# Altium PCB lichten.PcbDoc
Units mil, origin at the board's own origin, x right, y up, seen from the top; angles counter-clockwise.
Board outline 6000 x 4000 mil, 2 copper layers (Top Layer, Bottom Layer); 17 components, 14 nets, 64 pads, 7 vias.
Unrouted connection lines stored in the file: 3.
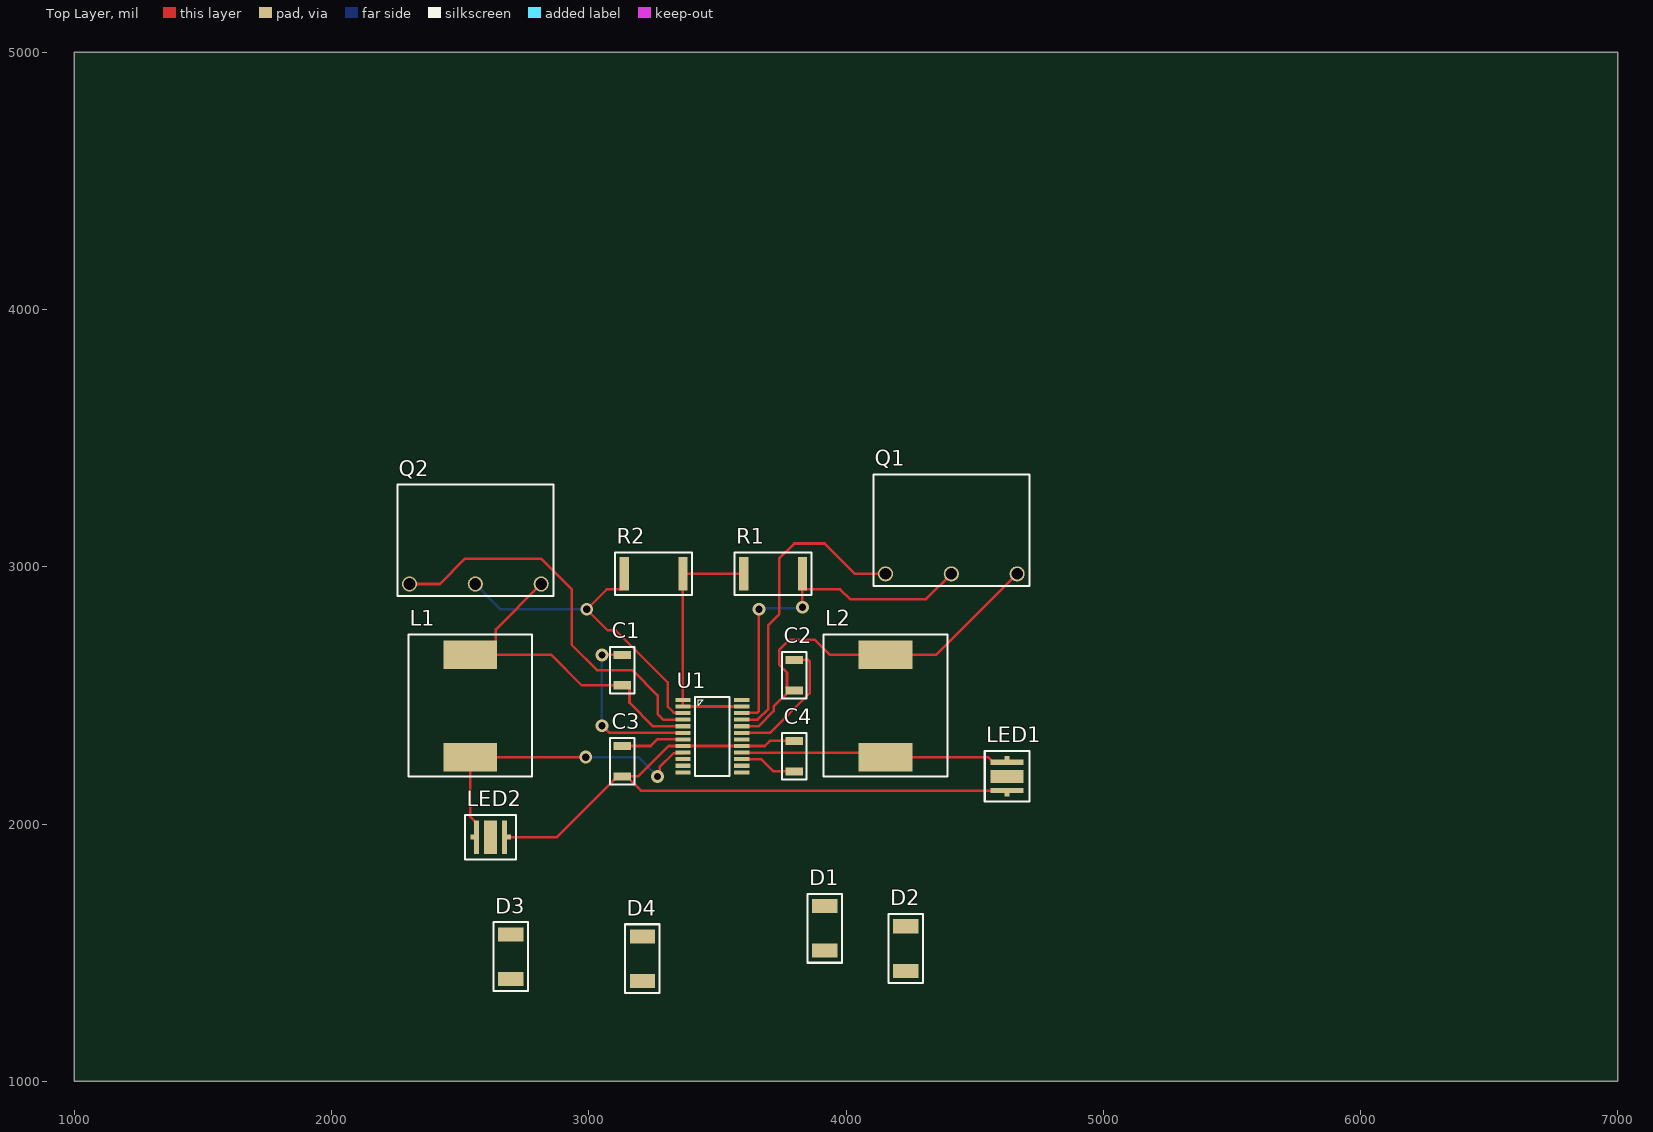
[diagram p0: Top Layer view]
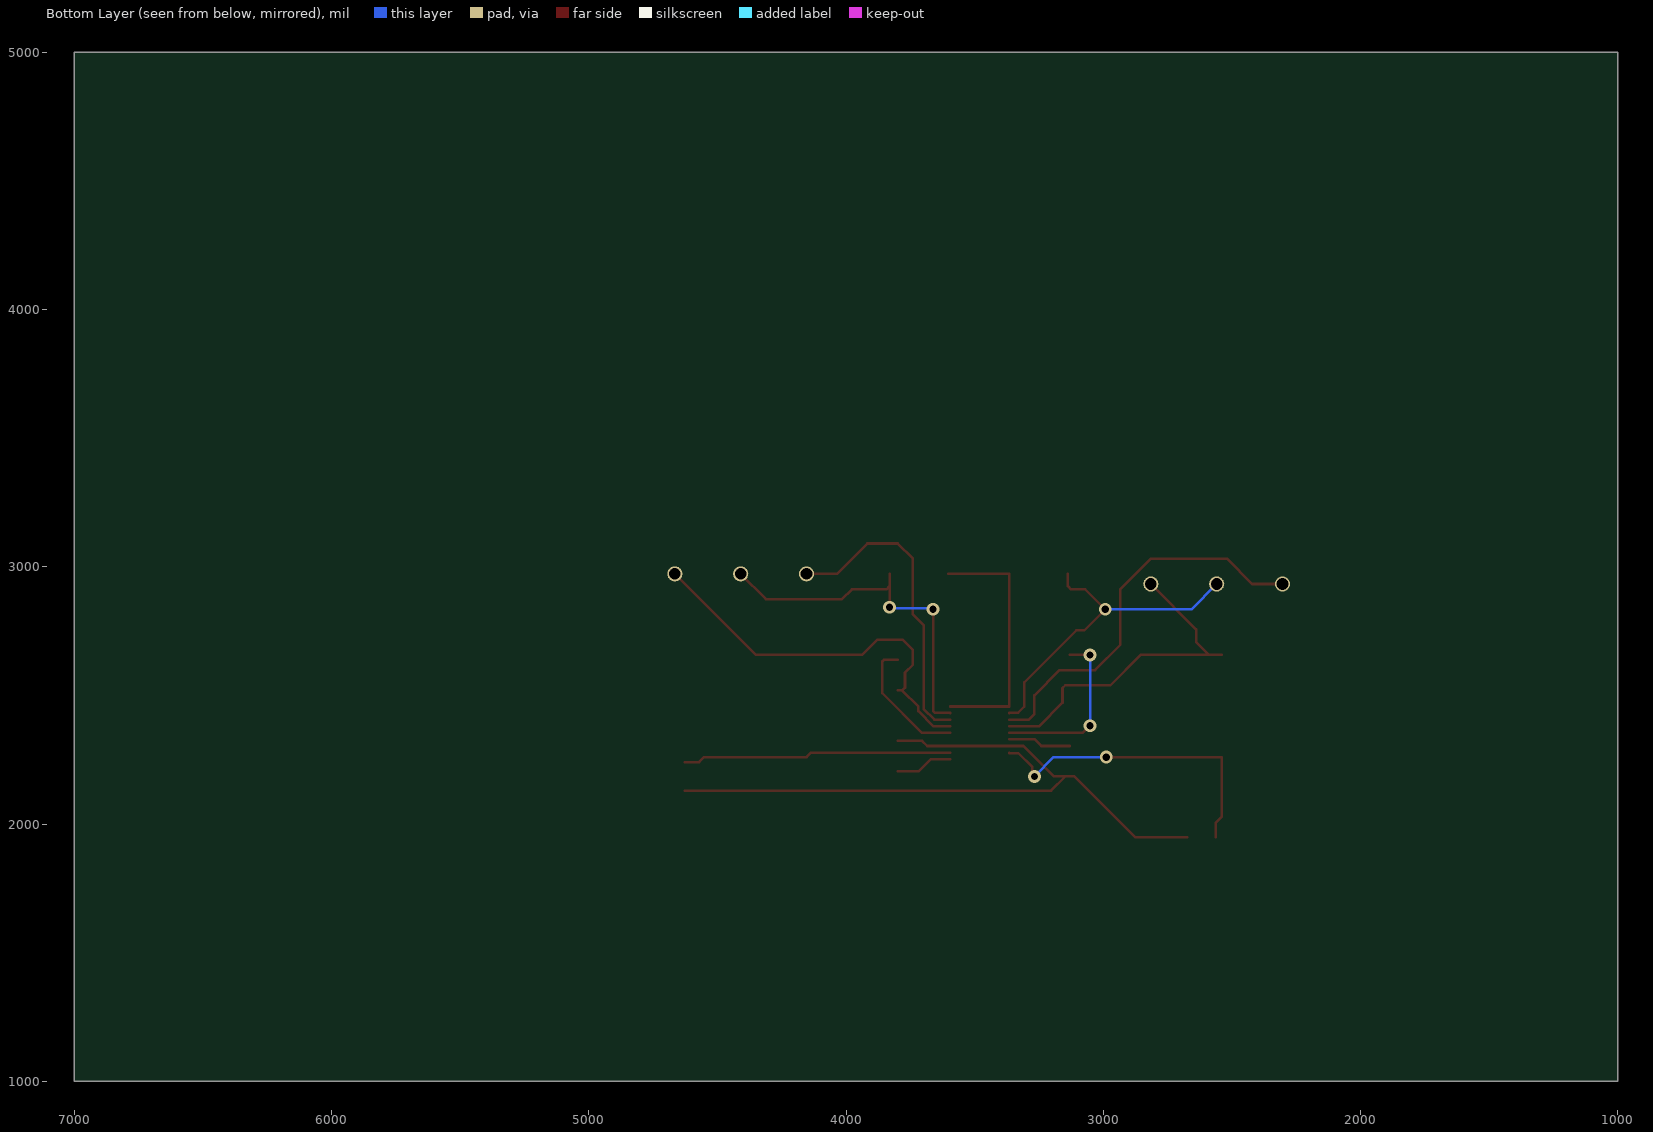
[diagram p1: Bottom Layer view, seen from below]

## Layer stack, top to bottom
Top Solder: solder mask 0.4, Solder Resist, Dk 3.5
Top Layer: signal copper 1.4
Dielectric 1: dielectric 12.6, FR-4, Dk 4.8
Bottom Layer: signal copper 1.4
Bottom Solder: solder mask 0.4, Solder Resist, Dk 3.5

## Board outline
1000,1000 7000,1000 7000,5000 1000,5000

## Design rules (kind name [scope] priority, off if disabled: settings)
Clearance [All] p1: gap=10 ignorepadtopadclearanceinfootprint=FALSE except(0: Arc-Hole Track-Hole SMDPad-Hole THPad-Hole Via-Hole Fill-Hole Poly-Hole Region-Hole Text-Hole)
MinimumSolderMaskSliver [All] p1: minsoldermaskwidth=3.94
PolygonConnect [All] p1: connectstyle=Relief reliefconductorwidth=10 reliefentries=4 polygonreliefangle="90 Angle" airgapwidth=10
RoomDefinition lichten [InComponentClass('lichten')] p1: confinementstyle=ConfineIn formatcopy=TRUE lockcomponents=FALSE outline 0,0 2000,0 2000,1000 0,1000
RoutingVias [All] p1: holewidth=28 width=50 viastyle="Through Hole" minholewidth=28 minwidth=50 maxholewidth=28 maxwidth=50
SolderMaskExpansion [All] p1: expansion=4 istentingtop=FALSE
Width [All] p1: maxlimit=10 minlimit=10 preferedwidth=10
29 further rules are at their usual default settings.

## Components (designator, comment, footprint, x,y, rotation, side; value= is the part's Value field where it differs from the comment)
C1 "0.1µF" RC1206 3129.92,2598.43 r90 top
C2 "0.1µF" RC1206 3799.21,2578.74 r90 top
C3 "0.1µF" RC1206 3129.92,2244.09 r90 top
C4 "0.1µF" RC1206 3799.21,2263.78 r270 top
D1 "schottky" PMEG3050EP,115 3917.32,1594.49 r90 top
D2 "schottky" PMEG3050EP,115 4232.28,1515.75 r90 top
D3 "schottky" PMEG3050EP,115 2696.85,1484.25 r90 top
D4 "schottky" PMEG3050EP,115 3208.66,1476.38 r90 top
L1 "68µH" SRR1210-680M 2539.37,2259.84 r0 top
L2 "68µH" SRR1210-680M 4153.54,2259.84 r0 top
LED1 "XPEBWT-L1-0000-00EE5" XPEBWT-L1-0000-00EE5 4625.98,2185.04 r270 top
LED2 "XPEBWT-L1-0000-00EE5" XPEBWT-L1-0000-00EE5 2618.11,1948.82 r0 top
Q1 "MOSFET N-CH" "IRLR024NTRPBF - DUPLICATE" 4153.54,2972.44 r0 top
Q2 "MOSFET N-CH" "IRLR024NTRPBF - DUPLICATE" 2303.15,2933.07 r0 top
R1 "Current shunt" ERJ-1TRQFR22U 3716.54,2972.44 r180 top
R2 "Current shunt" ERJ-1TRQFR22U 3251.97,2972.44 r180 top
U1 "LED Driver" TPS92518PWPT 3480.31,2482.28 r0 top

## Footprints (in the part's own frame and the unit in brackets; to place one, negate y for a bottom-side part, rotate by r counter-clockwise, add the part's x,y. Pads: shape width x height; smd on the part's side, far side on the other; paste and mask are expansions set on the pad)
ERJ-1TRQFR22U [mm]
  rect 0.9x3.3 smd: 1(-2.9,0) 2(2.9,0)
  silkscreen extent -3.8,-2.1 3.8,2.1
"IRLR024NTRPBF - DUPLICATE" [mm]
  round 1.5 hole 1.14: 1(0,0) 2(6.5,0) 3(13,0)
  silkscreen extent -1.2,-1.2 14.2,9.8
PMEG3050EP,115 [mm]
  rect 1.4x2.5 smd: A(-2.2,0) K(2.2,0)
  silkscreen extent -3.4,-1.7 3.4,1.7
RC1206 [mm]
  rect 0.8x1.7 smd: 1(-1.5,0) 2(1.5,0)
  silkscreen extent -2.3,-1.2 2.3,1.2
SRR1210-680M [mm]
  rect 5.3x2.8 smd: 1(0,0) 2(0,10.1)
  silkscreen extent -6.1,-1.9 6.1,12.1
TPS92518PWPT [mm]
  rect 1.5x0.4 smd: 1(-2.9,0) 2(-2.9,-0.65) 3(-2.9,-1.3) 4(-2.9,-1.95) 5(-2.9,-2.6) 6(-2.9,-3.25) 7(-2.9,-3.9) 8(-2.9,-4.55) 9(-2.9,-5.2) 10(-2.9,-5.85) 11(-2.9,-6.5) 12(-2.9,-7.15) 13(2.9,-7.15) 14(2.9,-6.5) 15(2.9,-5.85) 16(2.9,-5.2) 17(2.9,-4.55) 18(2.9,-3.9) 19(2.9,-3.25) 20(2.9,-2.6) 21(2.9,-1.95) 22(2.9,-1.3) 23(2.9,-0.65) 24(2.9,0)
  silkscreen extent -1.7,-7.5 1.7,0.3
XPEBWT-L1-0000-00EE5 [mm]
  rect 0.4x0.5 smd: 1(-1.8,0) 2(1.8,0)
  rect 0.5x3.3 smd: 1(-1.4,0) 2(1.4,0)
  rect 1.3x3.3 smd: ""(0,0)
  silkscreen extent -2.5,-2.2 2.5,2.2

## Part data
C1 C2 C3 C4: library part C0805C104K5RACTU, "Cap Ceramic 0.1uF 50V X7R 10% SMD 2.0 x 1.2 mm 125 C Paper T/R", Capacitance=100nF, Case Code (Imperial)=0805, Case Code (Metric)=2012, Dielectric=X7R, Dielectric Material=Ceramic, Manufacturer=KEMET, Max Operating Temperature=125°C, Min Operating Temperature=-55°C, Package Quantity=4000, Supplier Part Number 1=1414664, Tolerance=10%, Voltage=500V, Voltage Rating=50V, Case/Package=0805, Category="Ceramic Capacitors", ComponentLink1Description=https://datasheet.ciiva.com/14589/70095383-14589048.pdf?src-supplier=Allied+Electronics, ComponentLink1URL=https://datasheet.ciiva.com/14589/70095383-14589048.pdf?src-supplier=Allied+Electronics, ComponentLink2Description=https://datasheet.ciiva.com/28682/1851736-28682232.pdf?src-supplier=Element14, ComponentLink2URL=https://datasheet.ciiva.com/28682/1851736-28682232.pdf?src-supplier=Element14, ComponentLink3Description=https://datasheet.ciiva.com/32431/slceramic-chip-condensers-e-32431755.pdf?src-supplier=Distrelec, ComponentLink3URL=https://datasheet.ciiva.com/32431/slceramic-chip-condensers-e-32431755.pdf?src-supplier=Distrelec, ComponentLink4Description=https://datasheet.ciiva.com/18410/70095383-18410815.pdf?src-supplier=Allied+Electronics, ComponentLink4URL=https://datasheet.ciiva.com/18410/70095383-18410815.pdf?src-supplier=Allied+Electronics, Construction=Flat, Contact Plating=Tin,Matte, Depth=1.25mm, Height=0.9mm, Lead Pitch=0.75mm, Length=2mm, Manufacturer Part Number=C0805C104K5RACTU, Mount="Surface Mount,PCB", Number of Pins=2, Packaging="Tape and Reel", Pricing 1="10=0,07810, 100=0,05810, 500=0,03910, 1000=0,03450, 2000=0,03090 (GBP)", Radiation Hardening=No, REACH SVHC="No SVHC", RoHS=Yes, RoHS Compliant=Yes, Series=C0805C, Stock 1=148517, Supplier 1=Farnell, Termination=SMD/SMT, Thickness=0.035inch, Voltage Rating (DC)=50V, Width=1.2mm
D1 D2 D3 D4: library part PMEG3050EP,115, "NEXPERIA - PMEG3050EP,115 - Schottky-likriktare, 30 V, 5 A, Enkel, SOD-128, 2 Stift, 360 mV", Manufacturer="Nexperia USA", Supplier Part Number 1=1829197, ComponentLink1Description=http://www.farnell.com/datasheets/609324.pdf?src-supplier=Farnell, ComponentLink1URL=http://www.farnell.com/datasheets/609324.pdf?src-supplier=Farnell, ComponentLink2Description=https://assets.nexperia.com/documents/data-sheet/PMEG3050EP.pdf?src-supplier=Digi-Key, ComponentLink2URL=https://assets.nexperia.com/documents/data-sheet/PMEG3050EP.pdf?src-supplier=Digi-Key, Manufacturer Part Number=PMEG3050EP,115, Pricing 1="5=0,38500, 10=0,33600, 100=0,21500, 500=0,14100, 1000=0,10700, 5000=0,10300 (GBP)", RoHS=No, Stock 1=110544, Supplier 1=Farnell
L1 L2: library part SRR1210-680M, "BOURNS         SRR1210-680M.             INDUCTOR, SHIELDED, 68UH, 2.7A, SMD", Case/Package=1210, Current Rating=3A, DC Resistance (DCR)=102mR, Inductance=68uH, Inductance Tolerance=20%, Manufacturer=Bourns, Max Operating Temperature=125°C, Min Operating Temperature=-40°C, Package Quantity=250, Resistor Type=Wirewound, Saturation Current=2.7A, Self Resonant Frequency=3.8MHz, Supplier Part Number 1=2434810, Test Frequency=100kHz, Category="Fixed Inductors", ComponentLink1Description=https://datasheet.ciiva.com/11799/0900766b80f2b72a-11799858.pdf?src-supplier=RSComponents, ComponentLink1URL=https://datasheet.ciiva.com/11799/0900766b80f2b72a-11799858.pdf?src-supplier=RSComponents, ComponentLink2Description=https://datasheet.ciiva.com/48684/srr1210-48684857.pdf?src-supplier=Avnet, ComponentLink2URL=https://datasheet.ciiva.com/48684/srr1210-48684857.pdf?src-supplier=Avnet, ComponentLink3Description=https://datasheet.ciiva.com/17285/srr1210-17285962.pdf?src-supplier=Avnet+Europe, ComponentLink3URL=https://datasheet.ciiva.com/17285/srr1210-17285962.pdf?src-supplier=Avnet+Europe, ComponentLink4Description=https://datasheet.ciiva.com/6697/srr1210-6697611.pdf?src-supplier=Digi-Key, ComponentLink4URL=https://datasheet.ciiva.com/6697/srr1210-6697611.pdf?src-supplier=Digi-Key, ComponentLink5Description=https://datasheet.ciiva.com/46437/1430851-46437356.pdf?src-supplier=Element14, ComponentLink5URL=https://datasheet.ciiva.com/46437/1430851-46437356.pdf?src-supplier=Element14, ComponentLink6Description=https://datasheet.ciiva.com/6697/srr1210-6697613.pdf?src-supplier=Digi-Key, ComponentLink6URL=https://datasheet.ciiva.com/6697/srr1210-6697613.pdf?src-supplier=Digi-Key, ComponentLink7Description=https://datasheet.ciiva.com/46437/1430851-46437357.pdf?src-supplier=Element14, ComponentLink7URL=https://datasheet.ciiva.com/46437/1430851-46437357.pdf?src-supplier=Element14, ComponentLink8Description=https://datasheet.ciiva.com/6697/srr1210-6697615.pdf?src-supplier=Digi-Key, ComponentLink8URL=https://datasheet.ciiva.com/6697/srr1210-6697615.pdf?src-supplier=Digi-Key, Core Material=Ferrite, DC Current=3A, Depth=12.5mm, Height=10mm, Height - Seated (Max)=0.394inch, Length=12mm, Manufacturer Part Number=SRR1210-680M, Max DC Current=3A, Military Standard=Not, Mount="Surface Mount", Packaging="Tape and Reel", Pricing 1="1=0,82800, 10=0,75600, 25=0,68400, 50=0,57100, 100=0,53600, 250=0,46600, 1250=0,43300 (GBP)", Q Factor=12, REACH SVHC="No SVHC", RMS Current (Irms)=3A, RoHS=Yes, RoHS Compliant=Yes, Series=SRR1210, Shielding=Shielded, Stock 1=3, Supplier 1=Farnell, Termination=SMD/SMT, Tolerance=20%, Width=0.472inch
LED1 LED2: "LED, XLAMP, XP-E, NEUTRAL WHITE, 114LM", Case/Package=SMD/SMT, Color=White, Color Rendering Index (CRI)=75, Correlated Color Temperature (CCT)=4000K, Forward Current=350mA, Forward Voltage=2.9V, Lens Color=Clear, Manufacturer=Cree, Max Current Rating=1A, Max Operating Temperature=85°C, Max Power Dissipation=3W, Package Quantity=1000, Supplier Part Number 1=2216685, Thermal Resistance of Package=9°C/W, Category=LEDs, ComponentLink1Description=https://datasheet.ciiva.com/6348/xlampxpbl-6348581.pdf?src-supplier=Digi-Key, ComponentLink1URL=https://datasheet.ciiva.com/6348/xlampxpbl-6348581.pdf?src-supplier=Digi-Key, ComponentLink2Description=https://datasheet.ciiva.com/8073/xlampxpe-8073289.pdf?src-supplier=Element14, ComponentLink2URL=https://datasheet.ciiva.com/8073/xlampxpe-8073289.pdf?src-supplier=Element14, ComponentLink3Description=https://datasheet.ciiva.com/6348/xlampxpbl-6348587.pdf?src-supplier=Digi-Key, ComponentLink3URL=https://datasheet.ciiva.com/6348/xlampxpbl-6348587.pdf?src-supplier=Digi-Key, ComponentLink4Description=https://datasheet.ciiva.com/22791/xlampxpe-22791615.pdf?src-supplier=Farnell, ComponentLink4URL=https://datasheet.ciiva.com/22791/xlampxpe-22791615.pdf?src-supplier=Farnell, Depth=3.45mm, Height=2.36mm, Illumination Color=White, Lead Free="Lead Free", Length=3.45mm, Lens Style=Square, Luminous Flux=114lm, Manufacturer Part Number=XPEBWT-L1-0000-00EE5, Mount="Surface Mount", Number of Elements=1, Number of LEDs=1, Number of Pins=2, Packaging="Tape and Reel", Pricing 1="1=0,98400, 10=0,93000, 25=0,90700, 50=0,87600, 100=0,84500, 250=0,76600, 500=0,75600 (GBP)", Radiation Hardening=No, REACH SVHC=Unknown, RoHS=Yes, RoHS Compliant=Yes, Series="Xlamp XP-E2", Stock 1=979, Supplier 1=Farnell, Test Current=350mA, Viewing Angle=110°, Width=3.45mm
Q1 Q2: library part IRLR024NTRPBF, "Trans MOSFET N-CH 55V 17A 3-Pin(2+Tab) DPAK T/R", Case/Package=DPAK, Continuous Drain Current (ID)=17A, Drain to Source Breakdown Voltage=55V, Drain to Source Resistance=110mR, Drain-source On Resistance-Max=80mR, Gate to Source Voltage (Vgs)=16V, Input Capacitance=480pF, Manufacturer="International Rectifier", Max Operating Temperature=175°C, Max Power Dissipation=45W, Min Operating Temperature=-55°C, Package Quantity=1, Supplier Part Number 1=2468052, Category=MOSFETs, ComponentLink1Description=https://datasheet.ciiva.com/34303/2029683-34303947.pdf?src-supplier=Jameco, ComponentLink1URL=https://datasheet.ciiva.com/34303/2029683-34303947.pdf?src-supplier=Jameco, ComponentLink2Description=https://datasheet.ciiva.com/7835/irlr024npbf-7835786.pdf?src-supplier=Element14, ComponentLink2URL=https://datasheet.ciiva.com/7835/irlr024npbf-7835786.pdf?src-supplier=Element14, ComponentLink3Description=https://datasheet.ciiva.com/937/irlr024npbf-937362.pdf?src-supplier=Digi-Key, ComponentLink3URL=https://datasheet.ciiva.com/937/irlr024npbf-937362.pdf?src-supplier=Digi-Key, ComponentLink4Description=https://datasheet.ciiva.com/937/irlr024npbf-937363.pdf?src-supplier=Digi-Key, ComponentLink4URL=https://datasheet.ciiva.com/937/irlr024npbf-937363.pdf?src-supplier=Digi-Key, ComponentLink5Description=https://datasheet.ciiva.com/937/irlr024npbf-937361.pdf?src-supplier=Digi-Key, ComponentLink5URL=https://datasheet.ciiva.com/937/irlr024npbf-937361.pdf?src-supplier=Digi-Key, ComponentLink6Description=https://datasheet.ciiva.com/16364/irlr024npbf-16364248.pdf?src-supplier=Future+Electronics, ComponentLink6URL=https://datasheet.ciiva.com/16364/irlr024npbf-16364248.pdf?src-supplier=Future+Electronics, Current Rating=17A, Drain to Source Voltage (Vdss)=55V, Element Configuration=Single, Fall Time=29ns, Height=2.39mm, Lead Free="Lead Free", Length=6.73mm, Manufacturer Part Number=IRLR024NTRPBF, Mount="Surface Mount", Nominal Vgs=2V, Number of Elements=1, Number of Pins=3, On-State Resistance=80mR, Packaging="Tape and Reel", Power Dissipation=45W, Pricing 1="1=0,84600, 10=0,61400, 100=0,43100, 500=0,37300, 1000=0,28400 (GBP)", Radiation Hardening=No, Rds On Max=65mR, REACH SVHC="No SVHC", Rise Time=74ns, RoHS=Yes, RoHS Compliant=Yes, Series=HEXFET®, Stock 1=4226, Supplier 1=Farnell, Turn-Off Delay Time=20ns, Turn-On Delay Time=7.1ns, Voltage Rating (DC)=55V, Width=6.22mm
R1 R2: library part ERJ-1TRQFR22U, "Res Thick Film 2512 0.22 Ohm 1% 1W 200ppm/C Molded SMD SMD Embossed Carrier T/R", Case Code (Imperial)=2512, Case Code (Metric)=6432, Manufacturer=Panasonic, Max Operating Temperature=125°C, Max Power Dissipation=1W, Min Operating Temperature=-55°C, Package Quantity=1, Resistance=220mR, Resistance Tolerance=1%, Resistor Type="Thick Film,Low-Ohm-Resistor", Supplier Part Number 1=1717950, Temperature Coefficient=200ppm/°C, Case/Package=2512, Category="Chip SMD Resistors", ComponentLink1Description=https://datasheet.ciiva.com/11810/0900766b80eefa12-11810196.pdf?src-supplier=RSComponents, ComponentLink1URL=https://datasheet.ciiva.com/11810/0900766b80eefa12-11810196.pdf?src-supplier=RSComponents, ComponentLink2Description=https://datasheet.ciiva.com/48537/erj-eng-tds-48537781.pdf?src-supplier=Distrelec, ComponentLink2URL=https://datasheet.ciiva.com/48537/erj-eng-tds-48537781.pdf?src-supplier=Distrelec, ComponentLink3Description=https://datasheet.ciiva.com/30080/6aoa0000ce3-30080535.pdf?src-supplier=Onlinecomponents.com, ComponentLink3URL=https://datasheet.ciiva.com/30080/6aoa0000ce3-30080535.pdf?src-supplier=Onlinecomponents.com, ComponentLink4Description=https://datasheet.ciiva.com/17206/aoa0000ce3-17206874.pdf?src-supplier=Avnet+Europe, ComponentLink4URL=https://datasheet.ciiva.com/17206/aoa0000ce3-17206874.pdf?src-supplier=Avnet+Europe, ComponentLink5Description=https://datasheet.ciiva.com/43455/391509-43455978.pdf?src-supplier=Farnell, ComponentLink5URL=https://datasheet.ciiva.com/43455/391509-43455978.pdf?src-supplier=Farnell, ComponentLink6Description=https://datasheet.ciiva.com/24165/aoa0000ce3-72189-24165531.pdf?src-supplier=Mouser, ComponentLink6URL=https://datasheet.ciiva.com/24165/aoa0000ce3-72189-24165531.pdf?src-supplier=Mouser, ComponentLink7Description=https://datasheet.ciiva.com/16760/70068852-16760588.pdf?src-supplier=Allied+Electronics, ComponentLink7URL=https://datasheet.ciiva.com/16760/70068852-16760588.pdf?src-supplier=Allied+Electronics, ComponentLink8Description=https://datasheet.ciiva.com/6064/391509-6064542.pdf?src-supplier=Farnell, ComponentLink8URL=https://datasheet.ciiva.com/6064/391509-6064542.pdf?src-supplier=Farnell, ComponentLink9Description=https://datasheet.ciiva.com/9118/aoa0000ce3-9118718.pdf?src-supplier=Avnet, ComponentLink9URL=https://datasheet.ciiva.com/9118/aoa0000ce3-9118718.pdf?src-supplier=Avnet, ComponentLink10Description=https://datasheet.ciiva.com/16759/70068852-16759694.pdf?src-supplier=Allied+Electronics, ComponentLink10URL=https://datasheet.ciiva.com/16759/70068852-16759694.pdf?src-supplier=Allied+Electronics, ComponentLink11Description=https://datasheet.ciiva.com/16516/aoa0000ce3-16516271.pdf?src-supplier=Avnet+Asia, ComponentLink11URL=https://datasheet.ciiva.com/16516/aoa0000ce3-16516271.pdf?src-supplier=Avnet+Asia, Construction=Rectangular, Contact Plating=Tin, Depth=3.2mm, Features="Automotive AEC-Q200", Height=0.6mm, Length=6.4mm, Manufacturer Part Number=ERJ-1TRQFR22U, Military Standard=Not, Mount="Surface Mount", Number of Pins=2, Number of Terminations=2, Packaging="Tape and Reel", Power Rating=1W, Pricing 1="10=0,33700, 100=0,23200, 500=0,18800, 1000=0,15200, 2000=0,14200, 4000=0,13200, 20000=0,13100 (GBP)", Radiation Hardening=No, REACH SVHC="No SVHC", RoHS=Yes, RoHS Compliant=Yes, Series=ERJ, Size Code=2512, Stock 1=2340, Supplier 1=Farnell, Technology="THICK FILM", Termination=SMD/SMT, Tolerance=1%, Weight=0.001429oz, Width=3.2mm
U1: library part TPS92518PWPT, "42-V Dual buck LED controller with SPI interface, analog and PWM dimming 24-HTSSOP -40 to 125", Manufacturer="Texas Instruments", Max Operating Temperature=125°C, Min Operating Temperature=-40°C, Supplier Part Number 1=2837370, Category="LED Drivers", ComponentLink1Description=datasheet, ComponentLink1URL=https://www.ti.com/lit/ds/symlink/tps92518.pdf?ts=1620677843233&ref_url=https%253A%252F%252Fwww.ti.com%252Fsitesearch%252Fdocs%252Funiversalsearch.tsp%253FsearchTerm%253DTPS92518PWPT%2526nr%253D6, Manufacturer Part Number=TPS92518PWPT, Pricing 1="1=2,12000, 10=1,81000, 25=1,69000, 50=1,56000, 100=1,44000 (GBP)", RoHS=Yes, RoHS Compliant=Yes, Stock 1=60, Supplier 1=Farnell

## Via types
v1: diameter 50, hole 28, Top Layer to Bottom Layer, 7 vias

## Nets (pads, with @x,y where several pads share a name; then routed paths per layer and width w, separated by ;. In a path a pad name is that pad's centre, name@x,y a point inside that pad or via, vN(x,y) a via of type N, cw(c..) or ccw(c..) an arc to the next point about the centre after c; other vN are vias at no path point)
GND: C3.1 C4.1 LED1.2 LED2.2 U1.8 U1.17 | length 2782.1
  Top Layer w10: LED2.2@2673.23,1948.82 2688.98,1948.82 2875.98,1948.82 3112.2,2185.04 C3.1 C3.1@3147.64,2185.04 ; C4.1 3703.86,2322.83 3684.17,2303.15 U1.17 U1.8 3309.92,2303.15 3191.81,2185.04 C3.1@3147.64,2185.04 ; LED1.2@4625.98,2129.92 3202.76,2129.92 C3.1@3147.64,2185.04
NetC1_1: C1.1 L1.2 Q2.3 U1.5 | length 1344.5
  Top Layer w10: L1.2 L1.2@2588.58,2657.48 ; Q2.3 2638.7,2756.81 2638.7,2707.6 L1.2@2588.58,2657.48 ; U1.5 3250,2379.92 3158.39,2471.54 3158.39,2528.62 3147.64,2539.37 C1.1 2972.44,2539.37 2854.33,2657.48 L1.2@2588.58,2657.48
NetC1_2: C1.2 U1.6 | length 680.7
  Top Layer w10: v1(3051.18,2381.89) 3052.63,2381.89 3080.19,2354.33 U1.6 ; v1(3051.18,2657.48) C1.2
  Bottom Layer w10: v1(3051.18,2381.89) v1(3051.18,2657.48)
NetC2_1: C2.1 L2.2 Q1.3 U1.20 | length 1543.9
  Top Layer w10: U1.20 3659.21,2379.92 3718.34,2439.05 3718.34,2456.53 C2.1@3781.5,2519.69 ; C2.1 C2.1@3781.5,2519.69 ; Q1.3 4350.39,2657.48 L2.2 3937.01,2657.48 3877.95,2716.54 3779.53,2716.54 3740.16,2677.17 3740.16,2619.09 3770.75,2588.5 3770.75,2530.43 C2.1@3781.5,2519.69
NetC2_2: C2.2 U1.19 | length 512.7
  Top Layer w10: U1.19 3704.28,2354.33 3858.27,2508.31 3858.27,2631.94 3852.41,2637.8 C2.2
NetC3_2: C3.2 U1.7 U1.10 | length 246.8
  Top Layer w10: C3.2 3240.16,2303.15 3265.75,2328.74 U1.7
NetC4_2: C4.2 U1.15 U1.18 U1.24 | length 224.3
  Top Layer w10: U1.15 3670.39,2251.97 3717.64,2204.72 C4.2
NetL1_1: L1.1 LED2.1 U1.9 | length 1236.6
  Top Layer w10: LED2.1@2562.99,1948.82 2562.99,2003.94 2539.37,2027.56 L1.1 v1(2988.19,2259.84) ; v1(3267.72,2185.04) 3275.37,2192.69 3275.37,2220.8 3330.4,2275.83 3364.41,2275.83 U1.9
  Bottom Layer w10: v1(2988.19,2259.84) 2992.13,2263.78 2996.06,2259.84 3192.91,2259.84 v1(3267.72,2185.04)
NetL2_1: L2.1 LED1.1 U1.16 | length 1047
  Top Layer w10: U1.16 4135.83,2277.56 L2.1 4551.18,2259.84 4570.87,2240.16 LED1.1@4625.98,2240.16
NetQ1_1: Q1.1 U1.21 | length 1209.4
  Top Layer w10: U1.21 3656.52,2405.51 3698.34,2447.33 3698.34,2773.14 3740.16,2814.96 3740.16,3031.5 3799.21,3090.55 3917.32,3090.55 4035.43,2972.44 Q1.1
NetQ1_2: Q1.2 R1.1 U1.22 | length 1409.2
  Top Layer w10: U1.22 3596.22,2432.83 3655.56,2432.83 3661.42,2438.69 v1(3661.42,2834.65) ; v1(3830.71,2842.52) R1.1@3830.71,2925.2 ; R1.1 R1.1@3830.71,2925.2 ; Q1.2 4311.02,2874.02 4015.75,2874.02 3977.28,2912.48 3843.43,2912.48 R1.1@3830.71,2925.2
  Bottom Layer w10: v1(3661.42,2834.65) 3665.35,2838.58 3826.77,2838.58 v1(3830.71,2842.52)
NetQ2_1: Q2.1 U1.4 | length 1532.6
  Top Layer w10: Q2.1 2421.26,2933.07 2519.68,3031.5 2814.96,3031.5 2933.07,2913.39 2933.07,2696.85 3031.5,2598.43 3169.29,2598.43 3267.72,2500 3267.72,2427.12 3289.32,2405.51 U1.4
NetQ2_2: Q2.2 R2.2 U1.3 | length 1300.8
  Top Layer w10: R2.2 3137.8,2925.2 3125.08,2912.48 3069.96,2912.48 v1(2992.13,2834.65) 3073.55,2753.22 3104.61,2753.22 3307.09,2550.74 3307.09,2456.15 3330.4,2432.83 3364.41,2432.83 U1.3
  Bottom Layer w10: Q2.2 2657.48,2834.65 v1(2992.13,2834.65)
NetR1_2: R1.2 R2.1 U1.1 U1.2 U1.23 | length 980.3
  Top Layer w10: U1.23 U1.2 U1.1 R2.1 R1.2
pads on no net: D1.A D1.K D2.A D2.K D3.A D3.K D4.A D4.K LED1. LED2. U1.11 U1.12 U1.13 U1.14